# EAGLE board PTlogger_eagle (EAGLE 6.6.0)
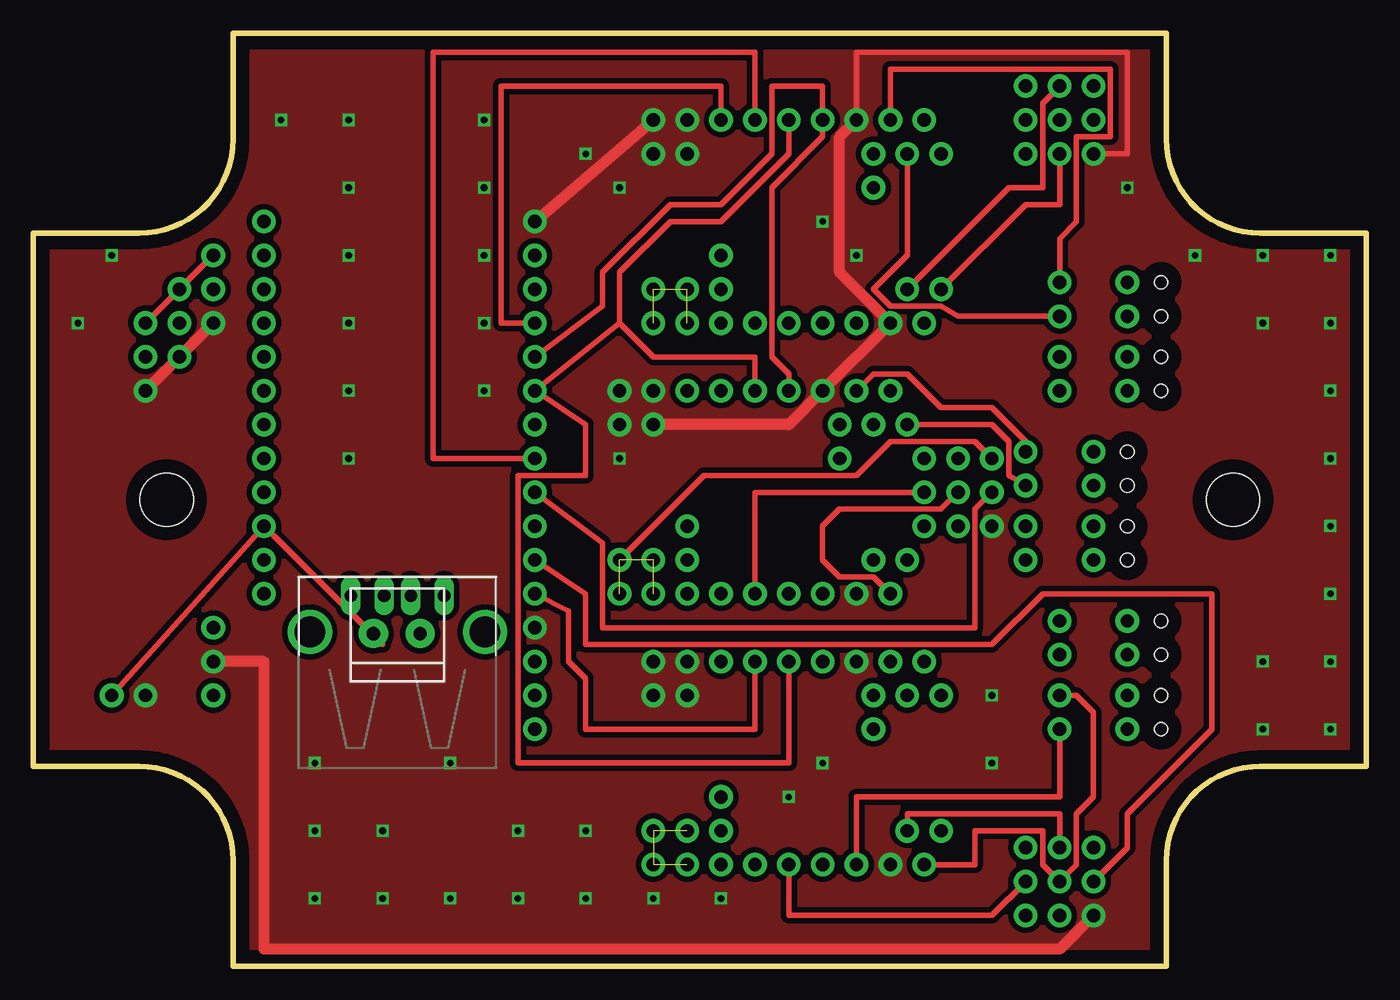
[diagram p0: board, top side]
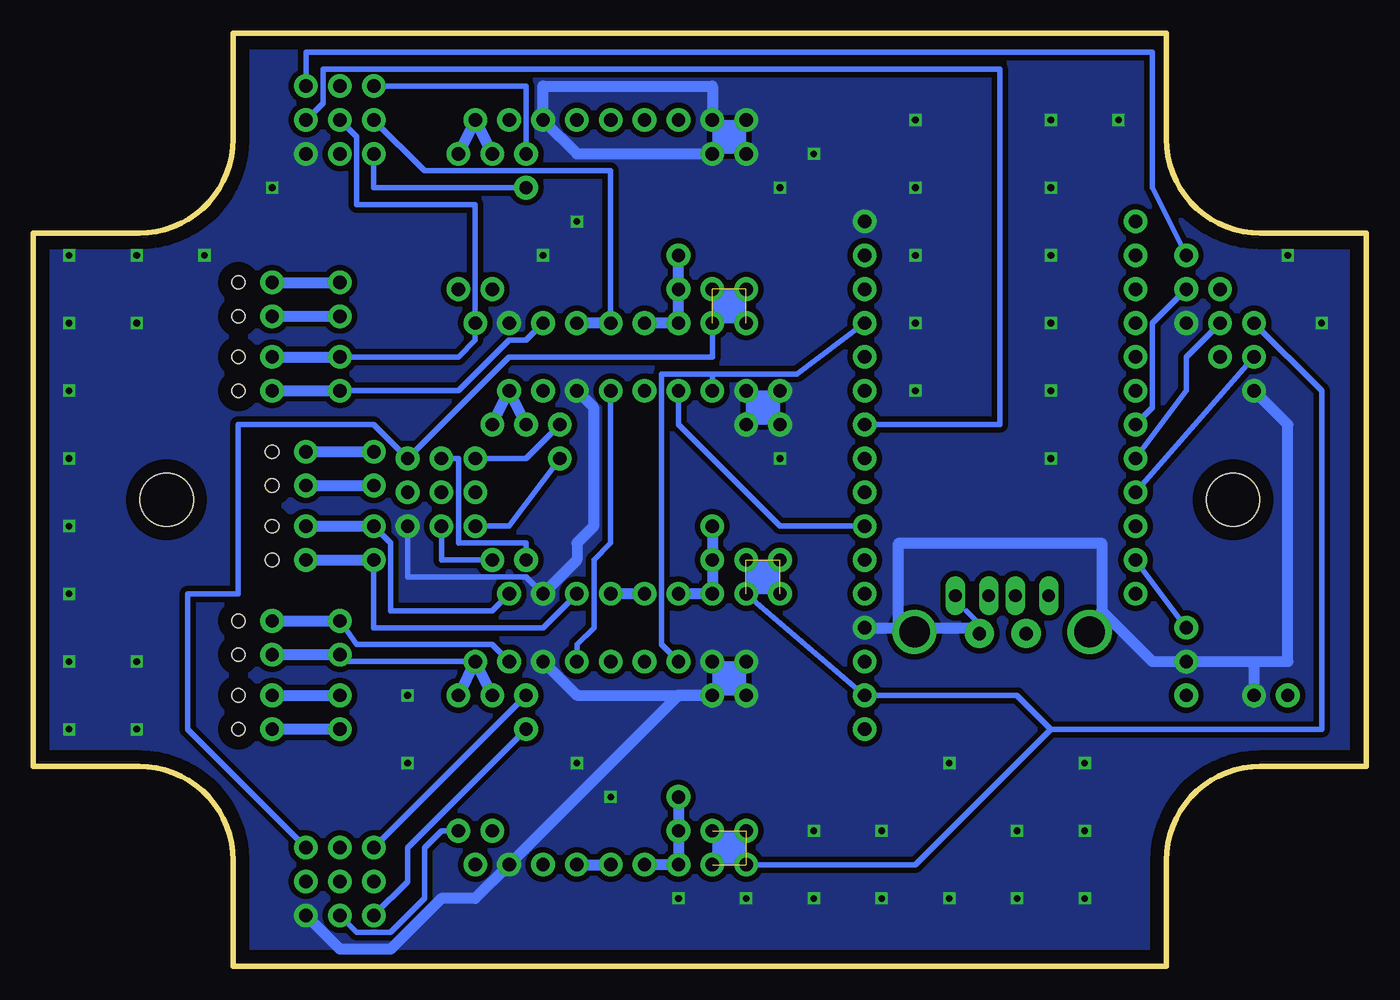
[diagram p1: board, bottom side, seen from below]

Size 100 x 70 mm. Coordinates in mm from the lower left corner, seen from the top.
Outline: 100,15 100,55 92.07,55 arc-90 85,62.07 85,70 15,70 15,62.07 arc-90 7.93,55 0,55 0,15 7.93,15 arc-90 15,7.93 15,0 85,0 85,7.93 arc-90 92.07,15 100,15
Copper layers (1*16): Top 0.035mm / dielectric 1.5mm / Bottom 0.035mm
Design rules "default *": minimum track width 10mil, minimum drill 24mil, track to track 8mil, track to pad 8mil, pad to pad 8mil, via to via 8mil, smd to smd 8mil, copper to edge 40mil, drill to drill 8mil, minimum pad ring 10mil, minimum via ring 8mil, stop-mask expansion 4mil, vias tented up to drill 0mil, thermal gap 10mil
Holes 4 mm at 10,35 90,35
Holes 1 mm at 84.62,51.31 84.62,48.77 84.62,45.72 84.62,43.18 82.08,38.61 82.08,36.07 82.08,33.02 82.08,30.48 84.62,25.91 84.62,23.37 84.62,20.32 84.62,17.78

## Footprints (pad centres in the part's own frame; a part is rotated, then mirrored left to right if it is on the bottom)
USB_HOST-PTH = drill 0.95 long: D+ 1,6.52; D- -1,6.52; GND 3.5,6.52; VBUS -3.5,6.52 | drill 2.3 pad 2.9: S1 -6.57,3.81; S2 6.57,3.81
TERMBLOCK_1X2-3.5MM = drill 1 pad 2.184: 1 1.8,0; 2 -1.7,0

## Placement (x,y rotation side)
CN1  USBA_FEMALE  [USB_HOST-PTH]  27.31,21.27 0 top
X1  [TERMBLOCK_1X2-3.5MM]  27.22,24.96 0 top

## Library data of the parts
CN1 X1 = microbuilder

## Tracks (layer width: path | path; a pad name or v marks a point on that pad's centre or on a via)
+3.3V  (via drill 1 pad 1.78)  (9 unrouted)
  Top 0.406: v8.42,48.26 v13.5,53.34 | v71.92,38.1 70.65,39.37 64.3,39.37 61.76,36.83 50.33,36.83 v43.98,30.48
  Bottom 0.406: v79.54,66.04 79.54,68.58 16.04,68.58 16.04,58.42 v13.5,53.34 | v46.52,27.94 v37.63,20.32 26.2,20.32 23.66,17.78 | v46.52,7.62 33.82,7.62 23.66,17.78 | v8.42,48.26 3.34,43.18 3.34,17.78 23.66,17.78 | v49.06,48.26 49.06,45.72 64.3,45.72 v71.92,38.1 74.46,40.64 84.62,40.64 84.62,27.94 88.43,27.94 88.43,17.78 v79.54,8.89
  other vias: 49.06,10.16 46.52,10.16 49.06,7.62 43.98,27.94 46.52,30.48 49.06,50.8 46.52,50.8 46.52,48.26
+5V_USB  (via drill 1 pad 1.78)
  Top 0.406: 26.2,24.13 v17.31,33.02 v5.88,20.32
+FORCE_1  (via drill 1 pad 1.78)
  Top 0.406: v61.76,7.62 61.76,12.7 77,12.7 v77,17.78
  Bottom 0.813: v77,17.78 v82.08,17.78
+FORCE_2  (via drill 1 pad 1.78)
  Bottom 0.406: v59.22,27.94 61.76,25.4 74.46,25.4 v74.46,30.48
  Bottom 0.813: v79.54,30.48 v74.46,30.48
+FORCE_3  (via drill 1 pad 1.78)
  Bottom 0.406: v61.76,48.26 63.03,46.99 64.3,46.99 68.11,43.18 v77,43.18
  Bottom 0.813: v82.08,43.18 v77,43.18
+R_REF_1  (via drill 1 pad 1.78)
  Bottom 0.813: v54.14,7.62 v51.6,7.62 v51.6,10.16 v51.6,12.7
+R_REF_2  (via drill 1 pad 1.78)
  Bottom 0.813: v51.6,27.94 v49.06,27.94 v49.06,30.48 v49.06,33.02
+R_REF_3  (via drill 1 pad 1.78)
  Bottom 0.813: v54.14,48.26 v51.6,48.26 v51.6,50.8 51.6,53.34
+RTD_1  (via drill 1 pad 1.78)
  Top 0.406: v77,20.32 78.27,20.32 79.54,19.05 79.54,12.7 78.27,11.43 78.27,7.62 v77,6.35 75.73,7.62 75.73,10.16 70.65,10.16 70.65,7.62 v66.84,7.62
  Bottom 0.813: v82.08,20.32 v77,20.32
+RTD_2  (via drill 1 pad 1.78)
  Top 0.406: v69.38,35.56 68.11,34.29 60.49,34.29 59.22,33.02 59.22,30.48 60.49,29.21 63.03,29.21 v64.3,27.94
  Bottom 0.406: v74.46,33.02 73.19,31.75 73.19,26.67 65.57,26.67 v64.3,27.94
  Bottom 0.813: v79.54,33.02 v74.46,33.02
+RTD_3  (via drill 1 pad 1.78)
  Bottom 0.406: v77,63.5 75.73,62.23 75.73,57.15 66.84,57.15 v66.84,48.26 66.84,46.99 68.11,45.72 v77,45.72
  Bottom 0.813: v82.08,45.72 v77,45.72
-FORCE_1  (via drill 1 pad 1.78)
  Bottom 0.406: v64.3,22.86 65.57,24.13 75.73,24.13 v77,25.91
  Bottom 0.813: v82.08,25.91 v77,25.91
-FORCE_2  (via drill 1 pad 1.78)
  Top 0.406: v61.76,43.18 63.03,44.45 65.57,44.45 68.11,41.91 71.92,41.91 74.46,39.37 v74.46,38.61
  Bottom 0.813: v79.54,38.61 v74.46,38.61
-FORCE_3  (via drill 1 pad 1.78)
  Top 0.406: v77,51.31 77,54.61 78.27,55.88 78.27,62.23 80.81,62.23 80.81,67.31 64.3,67.31 v64.3,63.5
  Bottom 0.813: v82.08,51.31 v77,51.31
-R_REF_1  (via drill 1 pad 1.78)
  Top 0.406: v74.46,6.35 71.92,3.81 56.68,3.81 v56.68,7.62
  Bottom 0.813: v59.22,7.62 v56.68,7.62
-R_REF_2  (via drill 1 pad 1.78)
  Top 0.406: v66.84,35.56 54.14,35.56 v54.14,27.94
  Bottom 0.813: v54.14,27.94 v56.68,27.94
-R_REF_3  (via drill 1 pad 1.78)
  Bottom 0.406: v74.46,63.5 70.65,59.69 56.68,59.69 v56.68,48.26
  Bottom 0.813: v56.68,48.26 v59.22,48.26
-RTD_1  (via drill 1 pad 1.78)
  Bottom 0.406: v66.84,22.86 77,22.86 v77,23.37
  Bottom 0.813: v65.57,20.32 v66.84,22.86 68.11,20.32 | v77,23.37 v82.08,23.37
-RTD_2  (via drill 1 pad 1.78)
  Top 0.406: v65.57,40.64 71.92,40.64 73.19,39.37 73.19,36.83 v74.46,36.07
  Bottom 0.813: v63.03,40.64 v64.3,43.18 v65.57,40.64 | v79.54,36.07 v74.46,36.07
-RTD_3  (via drill 1 pad 1.78)
  Top 0.406: v65.57,60.96 65.57,53.34 63.03,50.8 64.3,49.53 68.11,49.53 69.38,48.77 v77,48.77
  Bottom 0.813: v65.57,60.96 v66.84,63.5 68.11,60.96 | v82.08,48.77 v77,48.77
C_100_1  (via drill 1 pad 1.78)
  Bottom 0.406: v68.11,10.16 69.38,10.16 70.65,8.89 70.65,5.08 73.19,2.54 75.73,2.54 v77,3.81
C_100_2  (via drill 1 pad 1.78)
  Bottom 0.406: v69.38,33.02 69.38,30.48 v65.57,30.48
C_100_3  (via drill 1 pad 1.78)
  Top 0.406: v77,60.96 77,57.15 74.46,57.15 v68.11,50.8
C_1000_1  (via drill 1 pad 1.78)
  Top 0.406: v77,8.89 77,11.43 65.57,11.43 v65.57,10.16
C_1000_2  (via drill 1 pad 1.78)
  Bottom 0.406: v69.38,38.1 68.11,38.1 68.11,31.75 63.03,31.75 v63.03,30.48
C_1000_3  (via drill 1 pad 1.78)
  Top 0.406: v77,66.04 75.73,64.77 75.73,58.42 73.19,58.42 v65.57,50.8
CS_3  (via drill 1 pad 1.78)
  Top 0.406: v54.14,63.5 54.14,68.58 30.01,68.58 30.01,38.1 v37.63,38.1
GND  (via drill 0.5, 1 pad 1.78)
  Top 0.406: v79.54,60.96 82.08,60.96 82.08,68.58 61.76,68.58 v61.76,63.5
  Top 0.813: v8.42,43.18 v13.5,48.26 | v13.5,22.86 17.31,22.86 17.31,1.27 77,1.27 v79.54,3.81 | v46.52,63.5 v37.63,55.88 | v61.76,63.5 60.49,62.23 60.49,52.07 v64.3,48.26 v59.22,43.18 56.68,40.64 v46.52,40.64
  Bottom 0.406: 28.74,25.4 30.01,26.67 | 16.04,22.86 v13.5,22.86 8.42,22.86 | v71.92,33.02 71.92,29.21 63.03,29.21 v61.76,27.94
  Bottom 0.813: v61.76,22.86 59.22,20.32 v49.06,20.32 51.6,20.32 v64.3,7.62 66.84,5.08 69.38,5.08 73.19,1.27 77,1.27 v79.54,3.81 | v37.63,25.4 35.09,25.4 | 35.09,25.4 28.74,25.4 | 35.09,25.4 35.09,31.75 19.85,31.75 19.85,26.67 16.04,22.86 8.42,22.86 | v8.42,43.18 5.88,40.64 5.88,22.86 8.42,22.86 | 8.42,22.86 v8.42,20.32 | v49.06,63.5 49.06,66.04 61.76,66.04 v61.76,63.5 59.22,60.96 v49.06,60.96 | v61.76,27.94 59.22,30.48 59.22,31.75 57.95,33.02 57.95,41.91 v59.22,43.18
  other vias: 49.06,22.86 46.52,22.86 46.52,20.32 46.52,60.96 43.98,43.18 46.52,43.18 43.98,40.64 21.12,15.24 31.28,15.24 21.12,10.16 21.12,5.08 26.2,5.08 26.2,10.16 31.28,5.08 36.36,10.16 41.44,10.16 36.36,5.08 41.44,5.08 46.52,5.08 51.6,5.08 56.68,12.7 59.22,15.24 71.92,15.24 71.92,20.32 23.66,38.1 23.66,43.18 5.88,53.34 3.34,48.26 23.66,48.26 23.66,53.34 23.66,58.42 23.66,63.5 18.58,63.5 41.44,60.96 43.98,58.42 59.22,55.88 61.76,53.34 43.98,38.1 82.08,58.42 87.16,53.34 92.24,53.34 97.32,53.34 92.24,48.26 97.32,48.26 97.32,43.18 97.32,38.1 97.32,33.02 97.32,27.94 92.24,22.86 97.32,22.86 97.32,17.78 92.24,17.78 33.82,43.18 33.82,63.5 33.82,58.42 33.82,53.34 33.82,48.26
  pour Top (isolate 0.406): 85,0 85,7.79 arc-90 92.21,15 100,15 100,55 92.21,55 arc-90 85,62.21 85,70 15,70 15,62.28 arc-90 7.72,55 0,55 0,15 7.93,15 arc-90 15,7.93 15,0
  pour Bottom (isolate 0.406): 0,55 7.93,55 arc90 15,62.07 15,70 85,70 85,69 85,62.07 arc90 92.07,55 100,55 100,15 92.21,15 arc90 85,7.79 85,0 15,0 15,8 arc90 8,15 0,15
MISO  (via drill 1 pad 1.78)
  Top 0.406: v51.6,63.5 51.6,66.04 35.09,66.04 35.09,48.26 v37.63,48.26
  Bottom 0.406: v37.63,48.26 42.71,44.45 49.06,44.45 | v49.06,43.18 49.06,44.45 | 49.06,44.45 52.87,44.45 52.87,24.13 v51.6,22.86
MOSI  (via drill 1 pad 1.78)
  Top 0.406: v56.68,43.18 56.68,44.45 55.41,45.72 55.41,58.42 59.22,62.23 v59.22,63.5 59.22,66.04 55.41,66.04 55.41,60.96 51.6,57.15 47.79,57.15 42.71,52.07 42.71,49.53 v37.63,45.72
  Bottom 0.406: v59.22,22.86 59.22,24.13 57.95,25.4 57.95,30.48 56.68,31.75 v56.68,43.18
NC1  (via drill 1 pad 1.78)
  other vias: 17.31,43.18
NC2  (via drill 1 pad 1.78)
  other vias: 17.31,45.72
NC3  (via drill 1 pad 1.78)
  other vias: 17.31,48.26
NC4  (via drill 1 pad 1.78)
  other vias: 17.31,50.8
NC5  (via drill 1 pad 1.78)
  other vias: 17.31,53.34
NC6  (via drill 1 pad 1.78)
  other vias: 17.31,55.88
NC7  (via drill 1 pad 1.78)
  other vias: 17.31,27.94
NC8  (via drill 1 pad 1.78)
  other vias: 37.63,17.78
NC9  (via drill 1 pad 1.78)
  other vias: 37.63,22.86
NC10  (via drill 1 pad 1.78)
  other vias: 37.63,50.8
R_REF_100_1  (via drill 1 pad 1.78)
  Bottom 0.406: v63.03,17.78 71.92,8.89 71.92,6.35 v74.46,3.81
R_REF_100_2  (via drill 1 pad 1.78)
  Bottom 0.406: v60.49,38.1 64.3,33.02 v66.84,33.02
R_REF_100_3  (via drill 1 pad 1.78)
  Bottom 0.406: v74.46,60.96 74.46,58.42 v63.03,58.42
R_REF_1000_1  (via drill 1 pad 1.78)
  Bottom 0.406: v63.03,20.32 v74.46,8.89
R_REF_1000_2  (via drill 1 pad 1.78)
  Bottom 0.406: v60.49,40.64 63.03,38.1 v66.84,38.1
R_REF_1000_3  (via drill 1 pad 1.78)
  Bottom 0.406: v74.46,66.04 63.03,66.04 v63.03,60.96
S$3  (via drill 1 pad 1.78)
  Top 0.406: v54.14,22.86 54.14,17.78 41.44,17.78 41.44,21.59 40.17,22.86 40.17,26.67 v37.63,27.94
S$6  (via drill 1 pad 1.78)
  other vias: 10.96,45.72
S$7  (via drill 1 pad 1.78)
  other vias: 51.6,53.34
S$9  (via drill 1 pad 1.78)
  other vias: 10.96,50.8
S$17  (via drill 1 pad 1.78)
  other vias: 68.11,60.96
S$26  (via drill 1 pad 1.78)
  other vias: 68.11,20.32
S$36  (via drill 1 pad 1.78)
  other vias: 37.63,53.34
S$38  (via drill 1 pad 1.78)
  Bottom 0.406: v51.6,43.18 51.6,40.64 43.98,33.02 v37.63,33.02
SCLK  (via drill 1 pad 1.78)
  Top 0.406: v56.68,63.5 56.68,60.96 51.6,55.88 47.79,55.88 43.98,52.07 43.98,48.26 | v54.14,43.18 54.14,45.72 46.52,45.72 43.98,48.26 | 43.98,48.26 v37.63,43.18 41.44,40.64 41.44,36.83 36.36,36.83 36.36,15.24 56.68,15.24 v56.68,22.86
SELECT_4W_1  (via drill 1 pad 1.78)
  Bottom 0.406: v8.42,45.72 v17.31,35.56
SELECT_4W_2  (via drill 1 pad 1.78)
  Bottom 0.406: v10.96,48.26 13.5,45.72 13.5,43.18 v17.31,38.1
SELECT_4W_3  (via drill 1 pad 1.78)
  Bottom 0.406: v13.5,50.8 16.04,48.26 16.04,41.91 v17.31,40.64
SELECT_R_REF_1  (via drill 1 pad 1.78)
  Top 0.406: v79.54,6.35 82.08,8.89 82.08,11.43 88.43,17.78 88.43,27.94 75.73,27.94 71.92,24.13 41.44,24.13 41.44,27.94 v37.63,30.48
SELECT_R_REF_2  (via drill 1 pad 1.78)
  Top 0.406: v71.92,35.56 70.65,34.29 70.65,25.4 42.71,25.4 42.71,31.75 v37.63,35.56
SELECT_R_REF_3  (via drill 1 pad 1.78)
  Bottom 0.406: v79.54,63.5 78.27,64.77 78.27,67.31 27.47,67.31 27.47,40.64 v37.63,40.64
SWITCH_OFF  (via drill 1 pad 1.78)
  Bottom 0.406: v17.31,30.48 v13.5,25.4
SWITCH_ON  (via drill 1 pad 1.78)
  other vias: 13.5,20.32
(copper drawn outside any net)
  shapes: Bottom area x7